# EAGLE board V2164MIXER v2 (EAGLE 9.5.2)
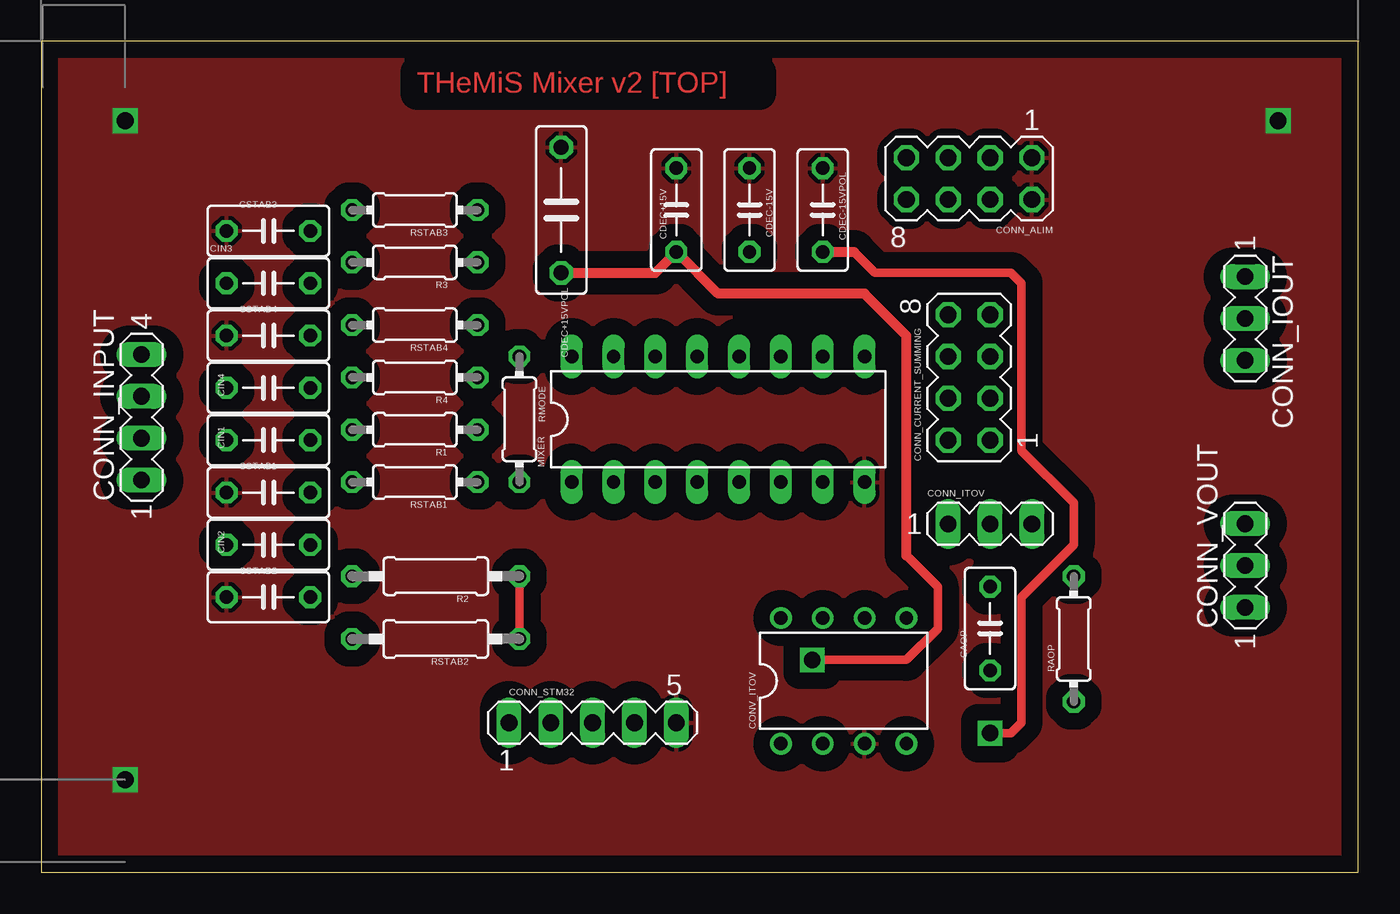
[diagram p0: board, top side]
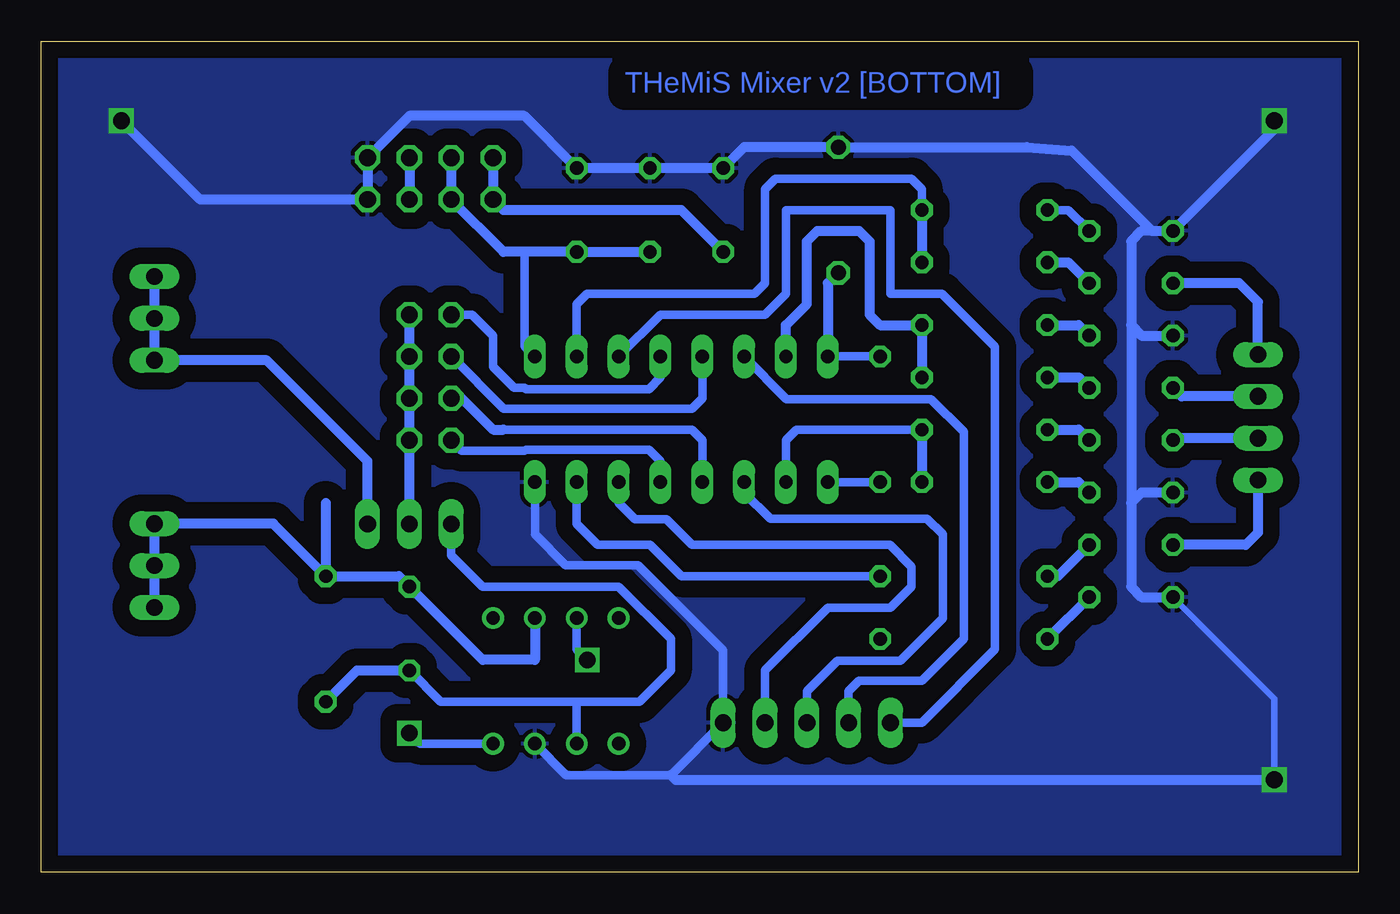
[diagram p1: board, bottom side, seen from below]

Size 79.97 x 50.44 mm. Coordinates in mm from the lower left corner, seen from the top.
Outline: 0,0 79.97,0 79.97,50.44 0,50.44 0,0
Copper layers (1*16): Top 0.035mm / dielectric 1.5mm / Bottom 0.035mm
Design rules "default *": minimum track width 0.4mm, minimum drill 0.35mm, track to track 0.4mm, track to pad 0.4mm, pad to pad 0.4mm, via to via 0.4mm, smd to smd 0.4mm, copper to edge 40mil, drill to drill 6mil, minimum pad ring 10mil, minimum via ring 8mil, stop-mask expansion 4mil, vias tented up to drill 0mil, thermal gap 10mil

## Footprints (pad centres in the part's own frame; a part is rotated, then mirrored left to right if it is on the bottom)
C050-030X075 = drill 0.813 octagon: 1 -2.54,0; 2 2.54,0
C075-032X103 = drill 0.914 octagon: 1 -3.81,0; 2 3.81,0
MA04-2 = drill 1.016 octagon: 1 -3.81,-1.27; 2 -3.81,1.27; 3 -1.27,-1.27; 4 -1.27,1.27; 5 1.27,-1.27; 6 1.27,1.27; 7 3.81,-1.27; 8 3.81,1.27
MA04-1 = drill 1.016 long: 1 -3.81,0; 2 -1.27,0; 3 1.27,0; 4 3.81,0
MA03-1 = drill 1.016 long: 1 -2.54,0; 2 0,0; 3 2.54,0
MA05-1 = drill 1.016 long: 1 -5.08,0; 2 -2.54,0; 3 0,0; 4 2.54,0; 5 5.08,0
DIL08 = drill 0.813 pad 1.27: 1 -3.81,-3.81; 2 -1.27,-3.81; 3 1.27,-3.81; 4 3.81,-3.81; 5 3.81,3.81; 6 1.27,3.81; 7 -1.27,3.81; 8 -3.81,3.81
DIL16 = drill 0.813 long: 1 -8.89,-3.81; 2 -6.35,-3.81; 3 -3.81,-3.81; 4 -1.27,-3.81; 5 1.27,-3.81; 6 3.81,-3.81; 7 6.35,-3.81; 8 8.89,-3.81; 9 8.89,3.81; 10 6.35,3.81; 11 3.81,3.81; 12 1.27,3.81; 13 -1.27,3.81; 14 -3.81,3.81; 15 -6.35,3.81; 16 -8.89,3.81
0204/7 = drill 0.813 octagon: 1 -3.81,0; 2 3.81,0
0207/10 = drill 0.813 octagon: 1 -5.08,0; 2 5.08,0

## Placement (x,y rotation side)
CAOP  1p  [C050-030X075]  57.61,14.79 90 top
CDEC+15V  100n  [C050-030X075]  38.56,40.19 270 top
CDEC+15VPOL  100n  [C075-032X103]  31.57,40.19 270 top
CDEC-15V  100n  [C050-030X075]  43,40.19 90 top
CDEC-15VPOL  100n  [C050-030X075]  47.45,40.19 90 top
CIN1  470n  [C050-030X075]  13.79,26.22 0 top
CIN2  470n  [C050-030X075]  13.79,19.87 0 top
CIN3  470n  [C050-030X075]  13.79,35.75 0 top
CIN4  470n  [C050-030X075]  13.79,29.4 0 top
CONN_ALIM  [MA04-2]  56.34,42.1 180 top
CONN_CURRENT_SUMMING  [MA04-2]  56.34,30.04 90 top
CONN_INPUT  [MA04-1]  6.09,27.61 90 top
CONN_IOUT  [MA03-1]  73.09,33.61 270 top
CONN_ITOV  [MA03-1]  57.61,21.14 0 top
CONN_STM32  [MA05-1]  33.48,9.08 0 top
CONN_VOUT  [MA03-1]  73.09,18.61 90 top
CONV_ITOV  NE5534AN  [DIL08]  48.72,11.62 0 top
CSTAB1  560p  [C050-030X075]  13.79,23.05 0 top
CSTAB2  560p  [C050-030X075]  13.79,16.7 0 top
CSTAB3  560p  [C050-030X075]  13.79,38.92 0 top
CSTAB4  560p  [C050-030X075]  13.79,32.58 0 top
MIXER  SSM2164_MULTI  [DIL16]  41.1,27.5 0 top
R1  27k  [0204/7]  22.68,26.86 180 top
R2  27k  [0207/10]  23.95,17.97 180 top
R3  27k  [0204/7]  22.68,37.02 180 top
R4  27k  [0204/7]  22.68,30.04 180 top
RAOP  33K  [0204/7]  62.69,14.16 90 top
RMODE  8.2k  [0204/7]  29.04,27.5 270 top
RSTAB1  470  [0204/7]  22.68,23.68 180 top
RSTAB2  470  [0207/10]  23.95,14.16 180 top
RSTAB3  470  [0204/7]  22.68,40.19 180 top
RSTAB4  470  [0204/7]  22.68,33.21 180 top

## Library data of the parts
CAOP CIN1-CIN4 = rcl; C3: 0.47 micro; SPICEPREFIX: C
CDEC+15V CDEC+15VPOL CDEC-15V CDEC-15VPOL CSTAB1-CSTAB4 = rcl; SPICEPREFIX: C
CONN_ALIM CONN_CURRENT_SUMMING CONN_INPUT CONN_IOUT CONN_ITOV CONN_STM32 CONN_VOUT = con-lstb; OC_FARNELL: unknown; OC_NEWARK: unknown
CONV_ITOV = linear
MIXER = analog-audio-chips
R1-R4 RAOP RMODE RSTAB1-RSTAB4 = rcl

## Nets
2164_IN1: MIXER.2 R1.1 RSTAB1.1
2164_IN2: MIXER.7 R2.1 RSTAB2.1
2164_IN3: MIXER.10 R3.1 RSTAB3.1
2164_IN4: MIXER.15 R4.1 RSTAB4.1
2164_MODE: MIXER.1 RMODE.2
2164_OUT1: CONN_CURRENT_SUMMING.4 MIXER.4
2164_OUT2: CONN_CURRENT_SUMMING.2 MIXER.5
2164_OUT3: CONN_CURRENT_SUMMING.8 MIXER.12
2164_OUT4: CONN_CURRENT_SUMMING.6 MIXER.13
+5V: CONN_ALIM.3 CONN_ALIM.4
+15V: CDEC+15V.2 CDEC+15VPOL.2 CONN_ALIM.7 CONN_ALIM.8 CONV_ITOV.7 MIXER.16 RMODE.1
-15V: CDEC-15V.1 CDEC-15VPOL.1 CONN_ALIM.5 CONN_ALIM.6 CONV_ITOV.4 MIXER.9
AGND: CDEC+15V.1 CDEC+15VPOL.1 CDEC-15V.2 CDEC-15VPOL.2 CONN_ALIM.1 CONN_ALIM.2 CONN_STM32.5 CONV_ITOV.3 CSTAB1.1 CSTAB2.1 CSTAB3.1 CSTAB4.1 MIXER.8
CURRENT_OUT: CONN_IOUT.1 CONN_IOUT.2 CONN_IOUT.3 CONN_ITOV.3
GAIN1: CONN_STM32.3 MIXER.3
GAIN2: CONN_STM32.4 MIXER.6
GAIN3: CONN_STM32.1 MIXER.11
GAIN4: CONN_STM32.2 MIXER.14
IN1: CIN1.1 CONN_INPUT.2
IN2: CIN2.1 CONN_INPUT.1
IN3: CIN3.1 CONN_INPUT.4
IN4: CIN4.1 CONN_INPUT.3
MIXER_OUT: CONN_CURRENT_SUMMING.1 CONN_CURRENT_SUMMING.3 CONN_CURRENT_SUMMING.5 CONN_CURRENT_SUMMING.7 CONN_ITOV.2
N$5: CIN4.2 R4.2
N$7: CSTAB4.2 RSTAB4.2
N$11: CIN2.2 R2.2
N$12: CAOP.1 CONN_ITOV.1 CONV_ITOV.2 RAOP.1
N$33: CSTAB2.2 RSTAB2.2
N$34: CSTAB1.2 RSTAB1.2
N$35: CIN1.2 R1.2
N$41: CSTAB3.2 RSTAB3.2
N$71: CIN3.2 R3.2
VOLTAGE_OUT: CAOP.2 CONN_VOUT.1 CONN_VOUT.2 CONN_VOUT.3 CONV_ITOV.6 RAOP.2

## Tracks (layer width: path | path; a pad name or v marks a point on that pad's centre or on a via)
2164_IN1
  Bottom 0.508: MIXER.2 34.75,26.22 34.12,26.86 R1.1
  Bottom 0.61: R1.1 RSTAB1.1
2164_IN2
  Top 0.508: R2.1 RSTAB2.1
  Bottom 0.508: MIXER.7 47.45,21.14 46.18,19.87 43,19.87 41.1,17.97 R2.1
2164_IN3
  Bottom 0.508: MIXER.10 47.45,34.48 46.81,35.11 36.66,35.11 36.02,35.75 36.02,41.46 35.38,42.1 27.13,42.1 26.49,41.46 RSTAB3.1
  Bottom 0.61: RSTAB3.1 R3.1
2164_IN4
  Bottom 0.61: R4.1 RSTAB4.1 29.04,33.21 29.67,33.84 29.67,38.29 30.3,38.92 32.84,38.92 33.48,38.29 33.48,34.48 34.75,33.21 MIXER.15
2164_MODE
  Bottom 0.508: MIXER.1 RMODE.2
2164_OUT1
  Bottom 0.508: MIXER.4 39.83,26.22 40.46,26.86 51.89,26.86
  Bottom 0.61: CONN_CURRENT_SUMMING.4 54.44,28.76 52.53,26.86 51.89,26.86
2164_OUT2
  Bottom 0.508: MIXER.5 42.37,24.96 43.07,25.66 50.53,25.66 50.6,25.59 54.44,25.59 CONN_CURRENT_SUMMING.2
2164_OUT3
  Bottom 0.508: MIXER.12 42.37,30.04 43.07,29.33 50.53,29.33 50.6,29.4 51.26,29.4 52.53,30.67 52.53,32.58 53.8,33.84 CONN_CURRENT_SUMMING.8
2164_OUT4
  Bottom 0.508: MIXER.13 39.83,28.76 40.46,28.13 51.88,28.13 CONN_CURRENT_SUMMING.6
+5V
  Bottom 0.61: CONN_ALIM.3 CONN_ALIM.4
+15V  (via drill 1)
  Top 0.508: 52.53,19.24 54.44,17.33 54.44,14.79 52.53,12.89 v46.81,12.89
  Top 0.61: CDEC+15VPOL.2 37.29,36.38 CDEC+15V.2 41.1,35.11 49.99,35.11 52.53,32.58 52.53,19.24
  Bottom 0.508: MIXER.16 RMODE.1 | CONV_ITOV.7 47.45,13.52 v46.81,12.89
  Bottom 0.61: CDEC+15VPOL.2 32.21,35.75 MIXER.16 | CDEC+15V.2 41.1,40.19 51.89,40.19 CONN_ALIM.8 CONN_ALIM.7
-15V  (via drill 1)
  Top 0.508: v57.61,8.44 58.88,8.44 59.52,9.08 59.52,16.7 62.69,19.87 62.69,22.41 59.52,25.59 59.52,35.75 58.88,36.38 50.62,36.38 49.35,37.66
  Top 0.61: CDEC-15VPOL.1 49.35,37.66
  Bottom 0.508: MIXER.9 50.62,31.94 50.62,37.66 | v57.61,8.44 56.98,7.81 CONV_ITOV.4
  Bottom 0.61: CONN_ALIM.5 CONN_ALIM.6 51.89,37.66 50.62,37.66 CDEC-15VPOL.1 CDEC-15V.1
AGND  (via drill 1.02)
  Bottom 0.4: CSTAB2.1 5.09,10.54 v5.09,5.61
  Bottom 0.508: CONV_ITOV.3 48.09,5.9 41.73,5.9 CONN_STM32.5 38.56,13.48 43.73,18.65 48.13,18.65 49.99,20.51 MIXER.8
  Bottom 0.61: CSTAB1.1 13.16,23.05 13.79,22.41 | 13.79,22.41 13.79,17.33 13.16,16.7 CSTAB2.1 | 12.53,38.92 13.16,38.92 13.79,38.29 13.79,33.21 | 13.79,33.21 13.16,32.58 CSTAB4.1 | 12.53,38.92 17.39,43.79 20.14,44 CDEC+15VPOL.1 37.29,44 CDEC+15V.1 CDEC-15V.2 CDEC-15VPOL.2 50.62,45.91 57.61,45.91 CONN_ALIM.1 CONN_ALIM.2 70.31,40.83 v75.09,45.61 | 12.53,38.92 CSTAB3.1 5.09,45.08 v5.09,45.61 | 13.79,33.21 13.79,22.41 | 41.73,5.9 41.45,5.61 v5.09,5.61
  pour Top (isolate 1.016): 0,50.45 79.66,50.45 79.66,0.63 0,0.63
  pour Bottom (isolate 1.016): 0,50.45 79.66,50.45 79.66,0.63 0,0.63
CURRENT_OUT
  Bottom 0.61: CONN_ITOV.3 60.15,24.96 66.27,31.07 CONN_IOUT.3 CONN_IOUT.2 CONN_IOUT.1
GAIN1
  Bottom 0.508: CONN_STM32.3 33.48,10.98 31.62,12.85 27.81,12.85 25.22,15.43 25.22,20.51 26.18,21.46 35.7,21.46 37.29,23.05 MIXER.3
GAIN2
  Bottom 0.508: CONN_STM32.4 36.02,12.25 32.21,16.07 28.4,16.07 27.13,17.33 27.13,18.56 28.45,19.87 40.45,19.87 41.99,21.42 43.91,21.42 44.91,22.41 MIXER.6
GAIN3
  Bottom 0.508: CONN_STM32.1 26.49,9.08 22.05,13.52 22.05,31.89 25.27,35.11 28.4,35.11 28.4,40.19 34.75,40.19 34.75,35.11 36.02,33.84 42.37,33.84 MIXER.11
GAIN4
  Bottom 0.508: MIXER.14 34.71,28.72 25.95,28.72 23.95,26.72 23.95,14.16 26.49,11.62 30.3,11.62 30.94,10.98 CONN_STM32.2
IN1
  Bottom 0.61: CONN_INPUT.2 11.13,26.34 CIN1.1
IN2
  Bottom 0.61: CONN_INPUT.1 6.09,20.61 6.83,19.87 CIN2.1
IN3
  Bottom 0.61: CONN_INPUT.4 6.09,34.61 7.23,35.75 CIN3.1
IN4
  Bottom 0.61: CONN_INPUT.3 10.74,28.89 CIN4.1
MIXER_OUT
  Bottom 0.61: CONN_ITOV.2 CONN_CURRENT_SUMMING.1 CONN_CURRENT_SUMMING.3 CONN_CURRENT_SUMMING.5 CONN_CURRENT_SUMMING.7
N$5
  Bottom 0.61: R4.2 16.97,30.04 CIN4.2
N$7
  Bottom 0.61: RSTAB4.2 16.97,33.21 CSTAB4.2
N$11
  Bottom 0.61: R2.2 18.24,17.97 CIN2.2
N$12
  Bottom 0.508: CONV_ITOV.2 47.45,10.35 | CAOP.1 55.7,10.35 47.45,10.35 | 47.45,10.35 46.81,10.35 43.64,10.35 41.73,12.25 41.73,14.16 44.91,17.33 53.16,17.33 55.07,19.24 CONN_ITOV.1
  Bottom 0.61: RAOP.1 60.78,12.25 CAOP.1
N$33
  Bottom 0.61: CSTAB2.2 RSTAB2.2
N$34
  Bottom 0.61: RSTAB1.2 16.97,23.68 CSTAB1.2
N$35
  Bottom 0.61: R1.2 16.97,26.86 CIN1.2
N$41
  Bottom 0.508: RSTAB3.2 17.61,40.19 CSTAB3.2
N$71
  Bottom 0.61: R3.2 17.61,37.02 CIN3.2
VOLTAGE_OUT
  Bottom 0.61: 62.69,22.41 RAOP.2 | RAOP.2 58.24,17.97 CAOP.2 53.16,12.89 49.99,12.89 CONV_ITOV.6 | RAOP.2 65.88,21.15 CONN_VOUT.3 CONN_VOUT.2 CONN_VOUT.1

## Text on the board
Top: THeMiS Mixer v2 [TOP]
Bottom: THeMiS Mixer v2 [BOTTOM]